# Altium PCB MC_PCB.PcbDoc
Units mm, origin at the board's own origin, x right, y up, seen from the top; angles counter-clockwise.
Board outline 75 x 70 mm, 2 copper layers (Top Layer, Bottom Layer); 48 components, 32 nets, 133 pads, 82 vias.
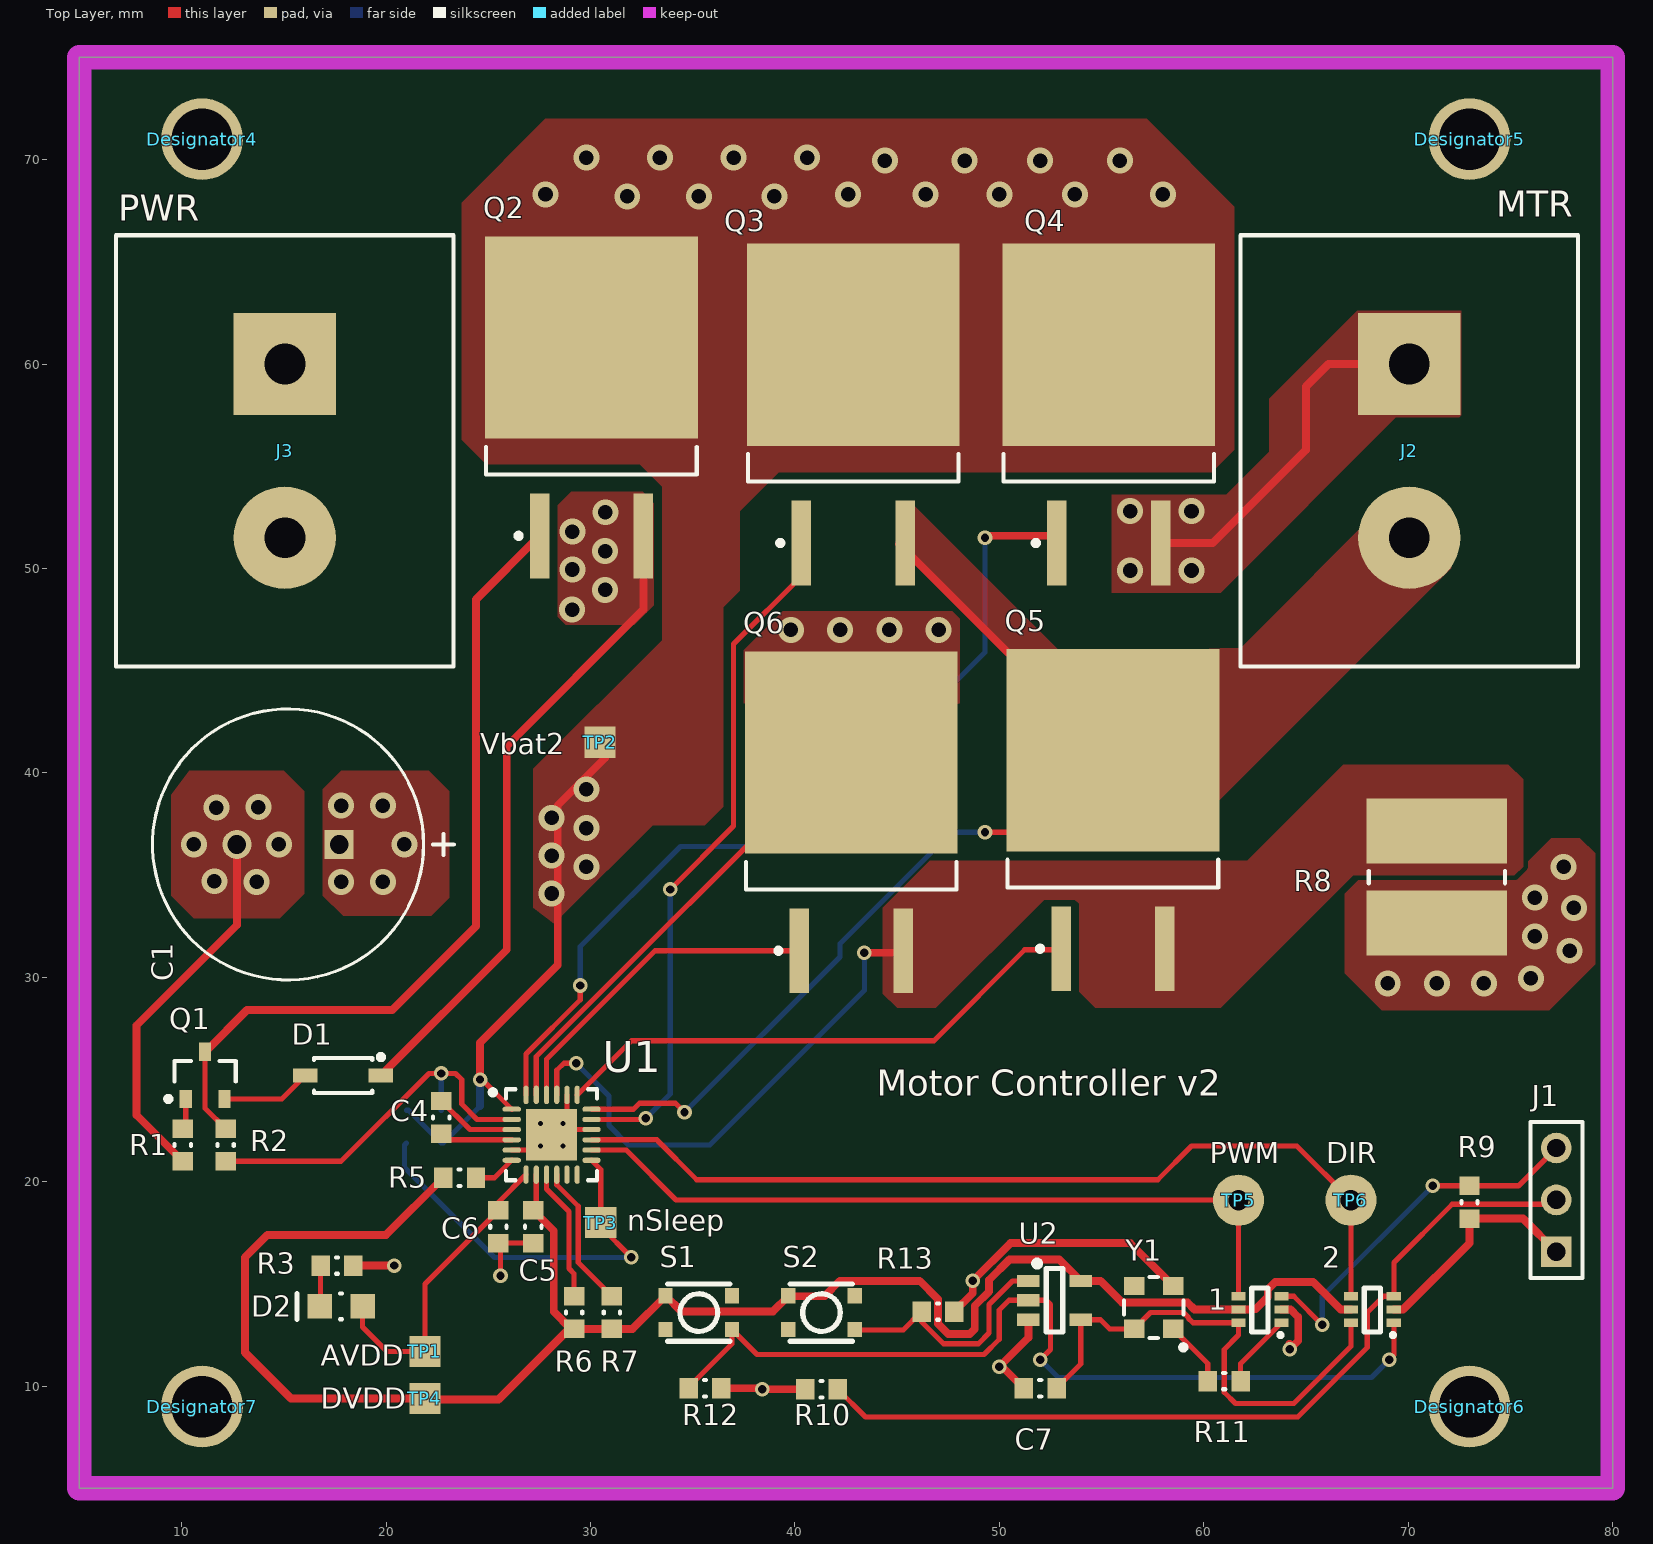
[diagram p0: Top Layer view]
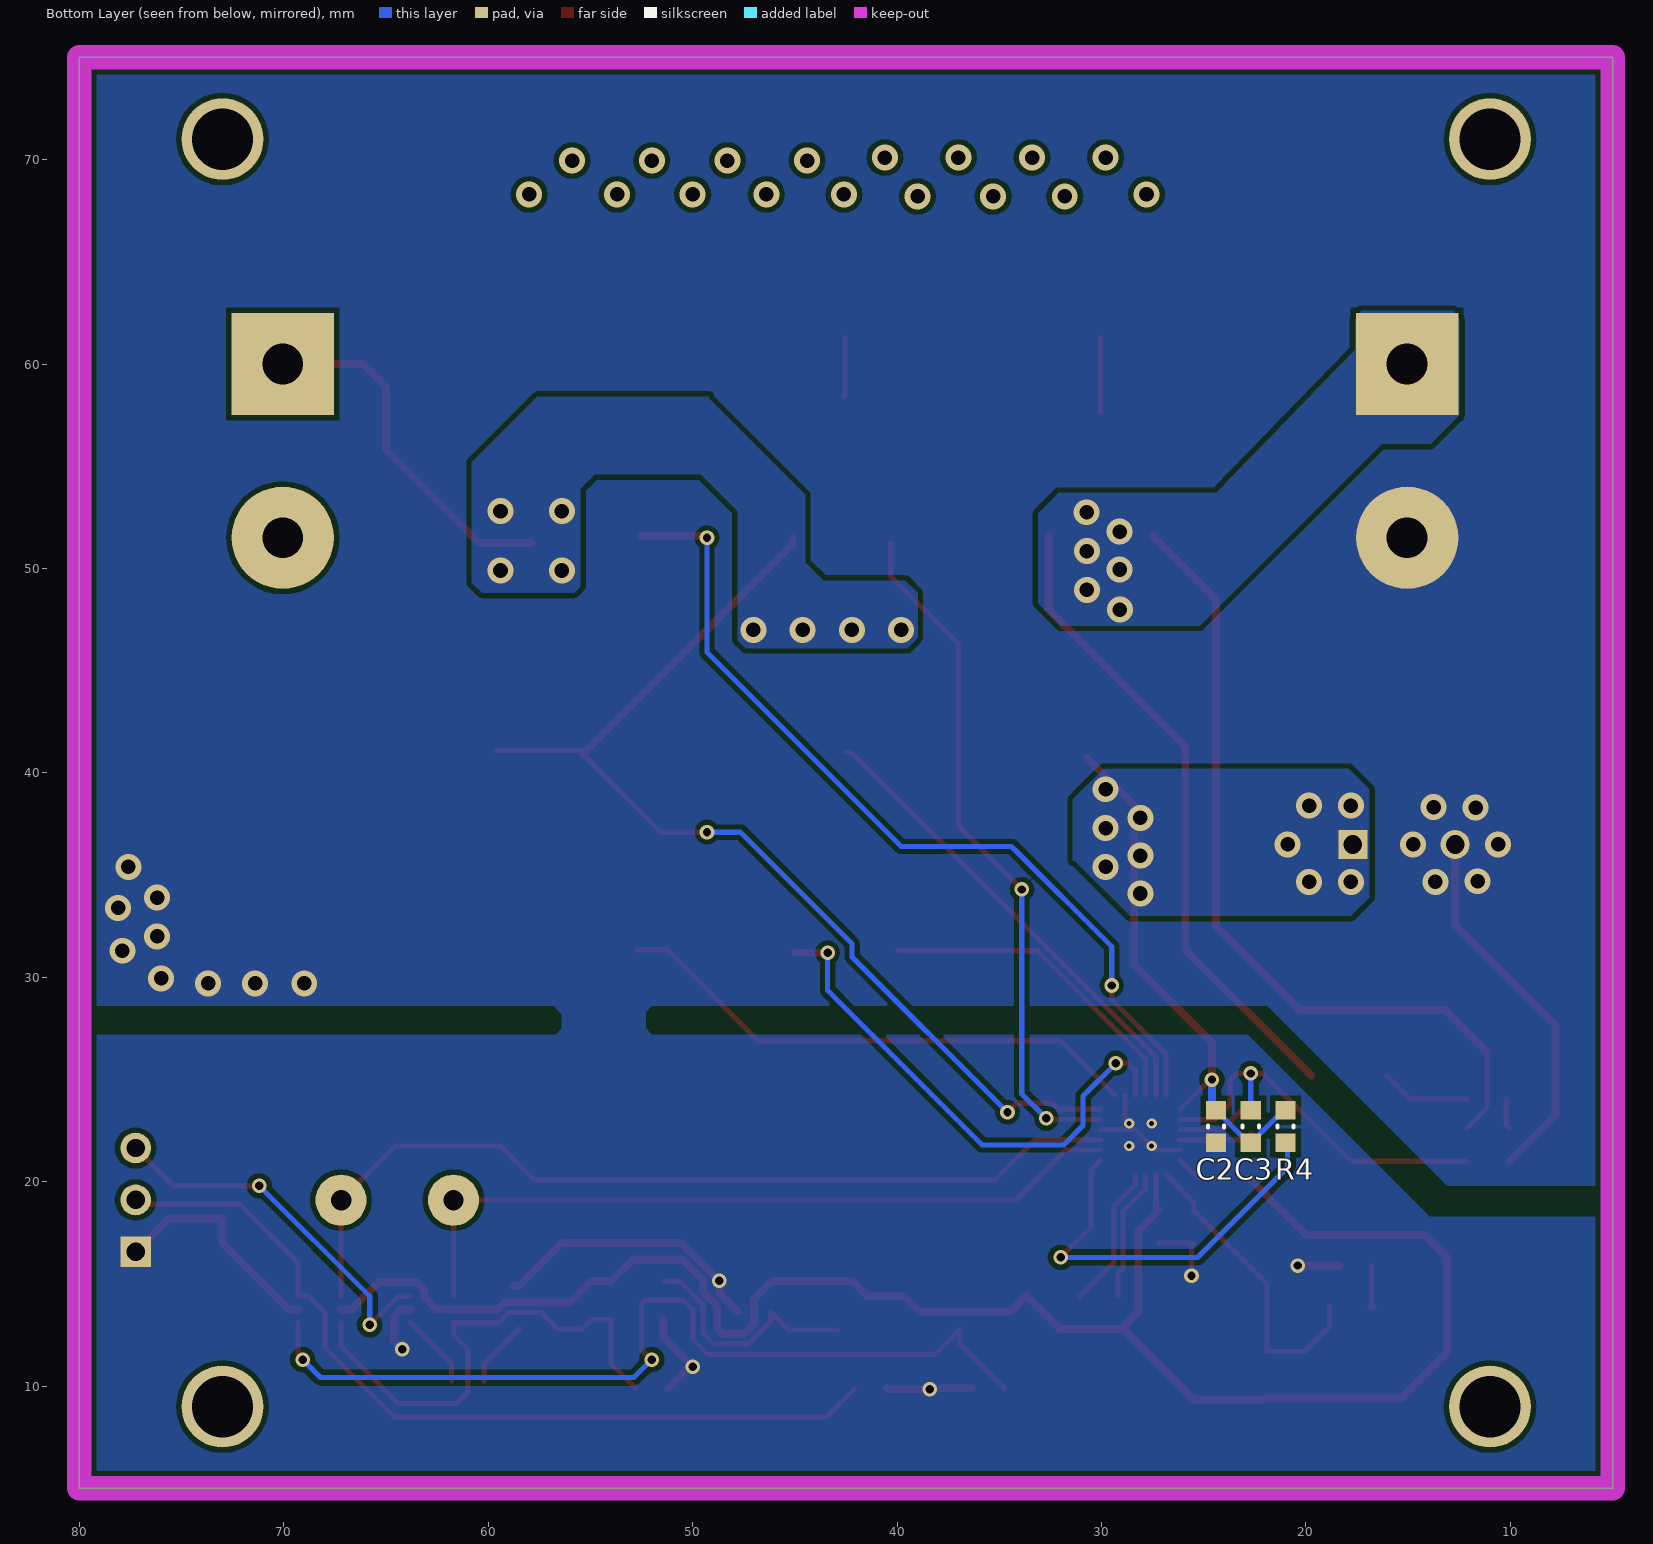
[diagram p1: Bottom Layer view, seen from below]

## Layer stack, top to bottom
Top Solder: solder mask 0.0102, Solder Resist, Dk 3.5
Top Layer: signal copper 0.0356
Dielectric 1: dielectric 0.32, FR-4, Dk 4.8
Bottom Layer: signal copper 0.0356
Bottom Solder: solder mask 0.0102, Solder Resist, Dk 3.5

## Board outline
5,5 5,75 80,75 80,5
cut-out: 12.167,88.254

## Design rules (kind name [scope] priority, off if disabled: settings)
Clearance [All] p1: gap=0.254 ignorepadtopadclearanceinfootprint=FALSE except(0: Arc-Hole Track-Hole SMDPad-Hole THPad-Hole Via-Hole Fill-Hole Poly-Hole Region-Hole Text-Hole; 0.1: SMDPad-SMDPad; 0.127: Arc-Arc Arc-Track Arc-SMDPad Track-Track Track-SMDPad)
HoleSize [All] p1: absolutevalues=TRUE maxlimit=2.54 minlimit=0.254 maxpercent=80.000 minpercent=20.000
PolygonConnect [All] p1: connectstyle=Direct reliefconductorwidth=0.254 reliefentries=4 polygonreliefangle="90 Angle" airgapwidth=0.254
RoutingVias [All] p1: holewidth=0.711 width=1.27 viastyle="Through Hole" minholewidth=0.711 minwidth=1.27 maxholewidth=0.711 maxwidth=1.27
SolderMaskExpansion [All] p1: expansion=0.102
Width [All] p1: maxlimit=0.508 minlimit=0.254 preferedwidth=0.254 minimp=50.000000 maximp=50.000000 favimp=50.000000
29 further rules are at their usual default settings.

## Classes and differential pairs
component class MCMainSch: C1 C2 C3 C4 C5 C6 D1 D2 Q1 Q2 Q3 Q4 Q5 Q6 R1 R2 R3 R4 R5 R6 R7 R8 TP1 TP2 TP3 TP4 U1
component class MC_Sch2: 1 2 C7 J1 J2 J3 R9 R10 R11 R12 R13 S1 S2 TP5 TP6 U2 Y1

## Components (designator, comment, footprint, x,y, rotation, side; value= is the part's Value field where it differs from the comment)
1 "74LVC1G3157GW,125" "IC MUX/DEMUX" 62.75,13.75 r180 top
2 "74LVC1G3157GW,125" "IC MUX/DEMUX" 68.25,13.75 r180 top
C1 "CAP_22uF_POL" CAPR-2/4h6.8 15.206,36.5 r180 top value=1000uF
C2 "CAP_0.1uF_16V_0603" CAPC0603(1608)55_N 24.4,22.7 r90 bottom value=0.1uF
C3 "CAP_0.1uF_16V_0603" CAPC0603(1608)55_N 22.698,22.7 r270 bottom value=0.1uF
C4 "CAP_0.1uF_16V_0603" CAPC0603(1608)55_N 22.7,23.15 r90 top value=0.1uF
C5 "CAP_1uF_16V_0603" CAPC0603(1608)55_N 27.2,17.8 r90 top value=1uF
C6 "CAP_1uF_16V_0603" CAPC0603(1608)55_N 25.5,17.8 r90 top value=1uF
C7 "CAP_10nF_0603" CAPC0603(1608)55_N 52,9.9 r180 top value=100nF
D1 "0" DIODSOD-123 17.9,25.2 r0 top
D2 "DIO_LED_G" LED_0805_LINE 17.8,13.9 r180 top
Designator4 "Comment" MOUNTING_HOLE#1 9.7,70.8 r0 top
Designator5 "Comment" MOUNTING_HOLE#2 74.5,70.8 r0 top
Designator6 "Comment" MOUNTING_HOLE#3 74.5,8.6 r0 top
Designator7 "Comment" MOUNTING_HOLE#4 9.7,10 r0 top
J1 "M" HDR1X3 77.25,16.57 r90 top
J2 "MTR" OSTYK51102030 70.05,55.75 r270 top
J3 "PWR" OSTYK51102030 15.05,55.75 r270 top
Q1 "NPN_40V_100mA" SOT23-3 11.15,25.2 r90 top
Q2 "NMOS_40V_75A" SOT404 30.05,59.75 r90 top
Q3 "NMOS_40V_75A" SOT404 42.85,59.4 r90 top
Q4 "NMOS_40V_75A" SOT404 55.35,59.4 r90 top
Q5 "NMOS_40V_75A" SOT404 55.56,39.555 r90 top
Q6 "NMOS_40V_75A" SOT404 42.76,39.455 r90 top
R1 "RES_43K_0603" RESC0603(1608)_N 10.05,21.8 r90 top value=43K
R2 "RES_10K_0603" RESC0603(1608)_N 12.15,21.8 r90 top value=10K
R3 "RES_0R_0603" RESC0603(1608)_N 17.6,15.9 r180 top value=100R
R4 "RES_698K_0603" RESC0603(1608)_N 21,22.7 r90 bottom value=698K
R5 "RES_10K_0603" RESC0603(1608)_N 23.6,20.2 r0 top value=10K
R6 "RES_10K_0603" RESC0603(1608)_N 29.2,13.6 r90 top value=10K
R7 "RES_10K_0603" RESC0603(1608)_N 31.05,13.6 r90 top value=10K
R8 "RES_10m_2728" STAC-CSS2725-099H_V 71.4,34.9 r90 top value=10m
R9 "RES_10K_0603" RESC0603(1608)_N 73,19 r90 top value=10K
R10 "RES_10K_0603" RESC0603(1608)_N 41.3,9.85 r0 top value=10K
R11 "RES_0R_0603" RESC0603(1608)_N 61,10.25 r0 top value=0R
R12 "RES_10K_0603" RESC0603(1608)_N 35.6,9.9 r180 top value=10K
R13 "RES_10K_0603" RESC0603(1608)_N 47,13.65 r180 top value=10K
S1 "SW_PWR" PTS830GM140 35.3,13.6 r180 top
S2 "SW_PWR" PTS830GM140 41.3,13.6 r180 top
TP1 "AVDD" TESTPOINT 21.9,11.7 r270 top
TP2 "Vbat2" TESTPOINT 30.468,41.5 r90 top
TP3 "nSleep" TESTPOINT 30.5,18 r90 top
TP4 "DVDD" TESTPOINT 21.9,9.4 r90 top
TP5 "PWM" TESTPOINT_LOOP 61.7,19.1 r0 top
TP6 "DIR" TESTPOINT_LOOP 67.2,19.1 r0 top
U1 "DRV8701ERGET" VFQFPN-24_N 28.1,22.3 r0 top
U2 "SN74AHC1G02DBVT" SOT23-5 52.7,14.2 r0 top
Y1 "2kHz" CDFN-4 58.5,12.8 r180 top

## Footprints (in the part's own frame and the unit in brackets; to place one, negate y for a bottom-side part, rotate by r counter-clockwise, add the part's x,y. Pads: shape width x height; smd on the part's side, far side on the other; paste and mask are expansions set on the pad)
CAPC0603(1608)55_N [mm] "Chip Capacitor, Body 1.6x0.8mm, Height 0.55mm, IPC Medium Density"
  rect 0.9x1 smd: 1(-0.8,0) 2(0.8,0)
  silkscreen extent -0.05,-0.4 0.05,0.4, body extent -0.87,-0.48 0.88,0.47, height 0.55
CAPR-2/4h6.8 [mil]
  rect 56x56 hole 36: 1(-98.5,0)
  round 56 hole 36: 2(98.5,0)
  silkscreen extent -319,-261 261,261
CDFN-4 [mm]
  rect 1x0.9 smd: 1(0,0) 2(0,-2.1) 3(1.9,-2.1) 4(1.9,0)
  silkscreen extent -0.63,-2.55 2.4,1.02
DIODSOD-123 [mm] "SOD-123, 2-Leads, Body 2.85x1.7mm (max), Pitch 3.7mm"
  rect 1.2x0.7 smd: 1(-1.85,0) 2(1.85,0)
  silkscreen extent -1.43,-0.85 1.97,1.02, body extent -1.42,-0.85 1.43,0.85, height 1.45
HDR1X3 [mm] "Connector; Header; 3 Position"
  rect 1.5x1.5 hole 0.9: 1(0,0)
  round 1.5 hole 0.9: 2(2.54,0) 3(5.08,0)
  silkscreen extent -1.27,-1.27 6.35,1.27
"IC MUX/DEMUX" [mm]
  rect 0.7x0.4 smd: 1(-1.05,0.65) 2(-1.05,0) 3(-1.05,-0.65) 4(1.05,-0.65) 5(1.05,0) 6(1.05,0.65)
  silkscreen extent -1.07,-1.05 0.4,1.32, body extent -1.05,-1 1.05,1, height 1.11
LED_0805_LINE [mm] "SMD, 2-Leads, Body 2x1.25mm"
  rect 1.2x1.2 smd: 1(-1.05,0) 2(1.05,0)
  silkscreen extent -0.05,-0.63 2.16,0.64, body extent -1,-0.63 1,0.63, height 0.8
MOUNTING_HOLE#1 [mm]
  round 4 hole 3 unplated: 0(1.3,0.2)
MOUNTING_HOLE#2 [mm]
  round 4 hole 3 unplated: 0(-1.5,0.2)
MOUNTING_HOLE#3 [mm]
  round 4 hole 3 unplated: 0(-1.5,0.4)
MOUNTING_HOLE#4 [mm]
  round 4 hole 3 unplated: 0(1.3,-1)
OSTYK51102030 [mm] "Connector; Header; 2 Position"
  rect 5x5 hole 2: 1(-4.25,0)
  round 5 hole 2: 2(4.25,0)
  silkscreen extent -10.55,-8.25 10.55,8.25
PTS830GM140 [mm] "PWR TACTILE SWITCH (RED)"
  rect 0.7x0.75 smd: 1(-1.625,0.825) 2(1.625,0.825) 3(-1.625,-0.825) 4(1.625,-0.825)
  silkscreen extent -1.53,-1.4 1.53,1.4
RESC0603(1608)_N [mm] "Chip Resistor, Body 1.6x0.8mm, IPC Medium Density"
  rect 0.9x1 smd: 1(-0.8,0) 2(0.8,0)
  silkscreen extent -0.05,-0.4 0.05,0.4, body extent -0.85,-0.47 0.85,0.47, height 0.6
SOT23-3 [mm] "SOT23, 3-Leads, Body 2.90x2.30mm, Pitch 0.95mm, IPC Medium Density"
  rect 0.9x0.6 smd: 1(-1.15,0.95) 2(-1.15,-0.95) 3(1.15,0)
  silkscreen extent -1.27,-1.5 0.7,1.92, body extent -1.3,-1.5 1.3,1.5, height 1.1
SOT23-5 [mm]
  rect 1.1x0.6 smd: 1(-1.279,0.95) 2(-1.279,0) 3(-1.279,-0.95) 4(1.279,-0.95) 5(1.279,0.95)
  silkscreen extent -0.99,-1.55 0.4,1.94, body extent -1.4,-1.45 1.4,1.45, height 1.2
SOT404 [mm]
  rect 4.15x0.95 smd: 1(-8.155,2.54) 3(-8.155,-2.54)
  rect 9.9x10.4 smd: 4(1.545,0)
  silkscreen extent -8.28,-5.15 -3.8,5.15, body extent -5.16,-5.15 4.64,5.15, height 4.5
STAC-CSS2725-099H_V [mm] "Chip Resistor, 2-Leads, Body 7.06x6.7mm"
  rect 3.18x6.86 smd: 1(-2.25,0) 2(2.25,0)
  silkscreen extent -0.3,-3.33 0.3,3.33, body extent -3.53,-3.35 3.53,3.35, height 1.24
TESTPOINT [mil]
  rect 60x60 smd: 1(0,0)
TESTPOINT_LOOP [mm]
  round 2.5 hole 1: 1(0,0)
VFQFPN-24_N [mm] "QFN, 24-Leads, Body 4x4mm, Pitch 0.5mm, Thermal Pad 2.5x2.5mm, IPC Medium Density"
  oval 0.9x0.25 smd: 1(-1.95,1.25) 2(-1.95,0.75) 3(-1.95,0.25) 4(-1.95,-0.25) 5(-1.95,-0.75) 6(-1.95,-1.25) 13(1.95,-1.25) 14(1.95,-0.75) 15(1.95,-0.25) 16(1.95,0.25) 17(1.95,0.75) 18(1.95,1.25)
  oval 0.25x0.9 smd: 7(-1.25,-1.95) 8(-0.75,-1.95) 9(-0.25,-1.95) 10(0.25,-1.95) 11(0.75,-1.95) 12(1.25,-1.95) 19(1.25,1.95) 20(0.75,1.95) 21(0.25,1.95) 22(-0.25,1.95) 23(-0.75,1.95) 24(-1.25,1.95)
  rect 2.5x2.5 smd: 25(0,0)
  silkscreen extent -3,-2.22 2.23,2.23, body extent -2.07,-2.07 2.08,2.08, height 1

## Part data
1 2: library part "IC MUX/DEMUX 2x1", Case/Package=TSSOP, Manufacturer="NXP Semiconductors", Max Operating Temperature=125°C, Max Power Dissipation=250mW, Max Supply Voltage=5.5V, Min Operating Temperature=-40°C, Min Supply Voltage=1.65V, On-State Resistance=15R, Operating Supply Current=40uA, Package Quantity=3000, Supplier Part Number 1=1727-6073-6-ND, Bandwidth=300MHz, ComponentLink1Description=http://www.nxp.com/documents/data_sheet/74LVC1G3157.pdf?src-supplier=Avnet, ComponentLink1URL=http://www.nxp.com/documents/data_sheet/74LVC1G3157.pdf?src-supplier=Avnet, ComponentLink2Description=https://www.verical.com/server-webapp/html/getDatasheet?partID=347929&src-supplier=Verical, ComponentLink2URL=https://www.verical.com/server-webapp/html/getDatasheet?partID=347929&src-supplier=Verical, ComponentLink3Description=http://www.nxp.com/documents/data_sheet/74LVC1G3157.pdf?src-supplier=Avnet+Asia, ComponentLink3URL=http://www.nxp.com/documents/data_sheet/74LVC1G3157.pdf?src-supplier=Avnet+Asia, ComponentLink4Description=http://www.nxp.com/documents/data_sheet/74LVC1G3157.pdf?src-supplier=Digi-Key, ComponentLink4URL=http://www.nxp.com/documents/data_sheet/74LVC1G3157.pdf?src-supplier=Digi-Key, ComponentLink5Description=http://www.nxp.com/documents/data_sheet/74LVC1G3157.pdf?src-supplier=Avnet+Europe, ComponentLink5URL=http://www.nxp.com/documents/data_sheet/74LVC1G3157.pdf?src-supplier=Avnet+Europe, Lead Free="Lead Free", Logic Function=Demultiplexer,Demux,Multiplexer,Mux, Manufacturer Part Number=74LVC1G3157GW,125, Mount="Surface Mount", Number of Channels=1, Number of Circuits=1, Number of Inputs=2, Number of Outputs=1, Number of Pins=6, Packaging="Tape and Reel", Power Dissipation=250mW, Pricing 1="1=0.37, 10=0.276, 100=0.156, 500=0.10332, 1000=0.07921 (USD)", Propagation Delay=1ns, Radiation Hardening=No, REACH SVHC="No SVHC", Stock 1=109219, Supplier 1=Digi-Key, Supply Type=Single, Turn-Off Delay Time=6ns, Turn-On Delay Time=8.7ns
C1: "CAP ALUM 22UF 20% 50V RADIAL", Digikey Part Number=732-8857-1-ND, Manufacturer="Wurth Electronics Inc.", MPN=860020672011, Tolerance=20%, Voltage Rating=50V
C2 C3 C4: "CAP CER 0.1UF 16V X7R 0603", Digikey Part Number=311-1088-1-ND, Manufacturer=Yageo, MPN=CC0603KRX7R7BB104, Package="0603 (1608 Metric)", Temperature Coefficient=X7R, Voltage Rating=16V, Dimensions="0.063\" L x 0.031\" W (1.60mm x 0.80mm)"
C5 C6: "CAP CER 1UF 16V Y5V 0603", Digikey Part Number=311-1372-1-ND, Manufacturer=Yageo, MPN=CC0603ZRY5V7BB105, Package="0603 (1608 Metric)", Temperature Coefficient=Y5V, Voltage Rating=16V, Dimensions="0.063\" L x 0.031\" W (1.60mm x 0.80mm)"
C7: "CAP CER 10000PF 16V X7R 0603", Digikey Part Number=311-3369-1-ND, Manufacturer=Yageo, MPN=CC0603KRX7R7BB103, Package="0603 (1608 Metric)", Temperature Coefficient=X7R, Voltage Rating=16V, Dimensions="0.063\" L x 0.031\" W (1.60mm x 0.80mm)"
D1: library part DIO_BAS16GW, "ESD PROTECTION DIODE", Digikey Part Number=1727-7320-1-ND, Manufacturer=Nexperia, MPN=BAS16GW, Package=SOD-123, ComponentLink1Description=Datasheet, ComponentLink1URL=https://assets.nexperia.com/documents/data-sheet/BAS16GW.pdf, Supplier 1=Digi-Key, Supplier Part Number 1=1727-7320-1-ND
D2: "LED GREEN DIFFUSED 0805 SMD", Digikey Part Number=475-1410-1-ND, Forward Voltage Drop=2.2V, Manufacturer=OSRAM, MPN="LG R971-KN-1", Package="0805 (2012 Metric)"
J1: library part "Header 3", "Header, 3-Pin", LatestRevisionDate=17-Jul-2002, LatestRevisionNote="Re-released for DXP Platform.", Publisher="Altium Limited"
J2 J3: library part TERMINAL_2, "Header, 2-Pin", LatestRevisionDate=17-Jul-2002, LatestRevisionNote="Re-released for DXP Platform.", Publisher="Altium Limited"
Q1: "TRANS NPN 40V 0.2A SOT23", Digikey Part Number=MMBT3904TPMSCT-ND, Manufacturer="Micro Commercial Co", MPN=MMBT3904-TP, Package="TO-236-3, SC-59, SOT-23-3", ComponentLink1Description=Datasheet, ComponentLink1URL=http://www.mccsemi.com/up_pdf/MMBT3904(SOT-23).pdf
Q2 Q3 Q4 Q5 Q6: "MOSFET N-CH 40V 75A D2PAK", Digikey Part Number=1727-7257-1-ND, Manufacturer="Nexperia USA Inc.", MPN=BUK768R1-40E,118, Package="TO-263-3, D²Pak (2 Leads + Tab), TO-263AB", Supplier Part Number 1=1727-7255-1-ND, ComponentLink1Description=Datasheet, ComponentLink1URL=http://aosmd.com/res/data_sheets/AO3420.pdf, Supplier 1=Digi-Key
R1: "RES SMD 43K OHM 5% 1/10W 0603", Digikey Part Number=311-43KGRCT-ND, Manufacturer=Yageo, MPN=RC0603JR-0743KL, Package="0603 (1608 Metric)", Tolerance=5%, Dimensions="0.063\" L x 0.031\" W (1.60mm x 0.80mm)"
R2 R5 R6 R7 R9 R10 R12 R13: "RES SMD 10K OHM 5% 1/10W 0603", Digikey Part Number=311-10KGRCT-ND, Manufacturer=Yageo, MPN=RC0603JR-0710KL, Package="0603 (1608 Metric)", Tolerance=5%, Dimensions="0.063\" L x 0.031\" W (1.60mm x 0.80mm)"
R3 R11: "RES SMD 0 OHM JUMPER 1/10W 0603", Digikey Part Number=311-0.0GRCT-ND, Manufacturer=Yageo, MPN=RC0603JR-070RL, Package="0603 (1608 Metric)", Dimensions="0.063\" L x 0.031\" W (1.60mm x 0.80mm)"
R4: "RES SMD 698K OHM 1% 1/10W 0603", Digikey Part Number=311-698KHRCT-ND, Manufacturer=Yageo, MPN=RC0603FR-07698KL, Package="0603 (1608 Metric)", Tolerance=1%, Dimensions="0.063\" L x 0.031\" W (1.60mm x 0.80mm)"
R8: "RES SMD 10mOHM 1% 4W 2728", Digikey Part Number=CSSH2728FT10L0DKR-ND, Manufacturer=Yageo, MPN=RC0603FR-07698KL, Package="0603 (1608 Metric)", Tolerance=1%, Dimensions="0.063\" L x 0.031\" W (1.60mm x 0.80mm)", Supplier 1=Digi-Key
S1 S2: "Power Switch (Red)", Digikey Part Number=CKN10587CT-ND, Manufacturer=C&K, MPN="PTS830GM140 SMTR LFS", ComponentLink1Description=Datasheet, ComponentLink1URL=https://www.ckswitches.com/media/1478/pts830.pdf
TP1 TP2 TP3 TP4 TP5 TP6: library part *, "TESTPOINT_SMD"
U1: library part "IC Motor Driver", Case/Package=VQFN, Manufacturer="Texas Instruments", Max Operating Temperature=125°C, Min Operating Temperature=-40°C, Supplier Part Number 1=296-42155-1-ND, Interface=Parallel, Lead Free="Lead Free", Manufacturer Part Number=DRV8701ERGET, Mount="Surface Mount", Packaging="Tape and Reel", Pricing 1="1=2.83, 10=2.541, 100=2.0425 (USD)", Stock 1=17098, Supplier 1=Digi-Key
U2: library part "IC GATE XOR", Case/Package=SOT-23, High Level Output Current=-8mA, Low Level Output Current=8mA, Manufacturer="Texas Instruments", Max Operating Temperature=125°C, Max Supply Voltage=5.5V, Min Operating Temperature=-40°C, Min Supply Voltage=2V, Package Quantity=250, Quiescent Current=1uA, Supplier Part Number 1=296-1094-1-ND, ComponentLink1Description=http://www.ti.com/lit/ds/symlink/sn74ahc1g02.pdf?src-supplier=Digi-Key, ComponentLink1URL=http://www.ti.com/lit/ds/symlink/sn74ahc1g02.pdf?src-supplier=Digi-Key, ComponentLink2Description=http://focus.ti.com/lit/ds/symlink/sn74ahc1g02.pdf?src-supplier=Avnet+Europe, ComponentLink2URL=http://focus.ti.com/lit/ds/symlink/sn74ahc1g02.pdf?src-supplier=Avnet+Europe, ComponentLink3Description=http://www.farnell.com/datasheets/1786933.pdf?src-supplier=Element14, ComponentLink3URL=http://www.farnell.com/datasheets/1786933.pdf?src-supplier=Element14, Lead Free="Lead Free", Logic Function=NOR, Manufacturer Part Number=SN74AHC1G02DBVT, Max Output Current=8mA, Mount="Surface Mount", Number of Bits=1, Number of Circuits=1, Number of Elements=1, Number of Gates=1, Number of Input Lines=2, Number of Inputs=2, Number of Output Lines=1, Number of Outputs=1, Number of Pins=5, Output Current=8mA, Packaging="Tape and Reel", Propagation Delay=7.5ns, Radiation Hardening=No, REACH SVHC="No SVHC", Supplier 1=Digi-Key, Termination=SMD/SMT, Turn-On Delay Time=8.5ns, Weight=0.000557oz
Y1: library part OSC_2kHz, "OSCILLATOR_2kHz", Supplier Part Number 1=DSC6083CI2A-002K000-ND, Supplier 1=Digi-Key

## Via types
v1: diameter 1.27, hole 0.711, Top Layer to Bottom Layer, 57 vias
v2: diameter 0.711, hole 0.406, Top Layer to Bottom Layer, 21 vias
v3: diameter 0.508, hole 0.254, Top Layer to Bottom Layer, 4 vias

## Nets (pads, with @x,y where several pads share a name; then routed paths per layer and width w, separated by ;. In a path a pad name is that pad's centre, name@x,y a point inside that pad or via, vN(x,y) a via of type N, cw(c..) or ccw(c..) an arc to the next point about the centre after c; other vN are vias at no path point)
AVDD: C6.2 D2.1 TP1.1 U1.7 | length 15.2
  Top Layer w0.254: D2.1 18.85,12.9 20.05,11.7 TP1.1 21.9,15 C6.2 25.5,19 U1.7
DVDD: 1.5 2.5 C5.2 R5.1 R6.1 R7.1 S1.4 S2.4 TP4.1 U1.8 U2.5 | length 89.1
  Top Layer w0.254: C5.2 27.35,18.75 U1.8
  Top Layer w0.381: R5.1 20,17.4 14.2,17.4 13.1,16.3 13.1,11.65 15.35,9.4 TP4.1 21.95,9.35 25.5,9.35 28.95,12.8 R6.1@29.05,12.8 ; C5.2 28.2,17.6 28.2,13.65 R6.1@29.05,12.8 ; 2.5 66.7,13.75 65.35,15.1 63.501,15.1 63.132,14.732 63.132,14.363 62.53,13.761 62.2,13.761 62.2,13.75 1.5 59.55,13.75 59.2,14.1 56,14.1 54.95,15.15 U2.5 52.929,16.2 50.5,16.2 49.5,15.2 49.5,14.632 48.8,13.932 48.8,12.8 48.55,12.55 47.5,12.55 47,13.05 47,14.25 46.1,15.15 42.2,15.15 41.45,14.4 39.675,14.4 38.925,13.65 34.45,13.65 S1.4 32.05,12.8 R7.1 R6.1 R6.1@29.05,12.8
GND: 1.2 2.2 C1.2 C2.1 C5.1 C6.1 C7.2 J1.1 J3.2 R1.1 R3.1 R8.1 R9.1 R10.1 R12.1 R13.1 U1.5 U1.16 U1.20 U1.25 U2.3 Y1.2 | length 65.5
  Top Layer w0.254: v2(25.6,15.4) 25.6,16.9 C6.1 C5.1 ; U1.5 U1.25@27.35,21.55 ; v3(27.55,21.75) U1.25 28.35,22.55 U1.16 ; U1.25@28.85,23.05 U1.20
  Top Layer w0.381: R1.1 7.8,23.25 7.8,27.65 12.704,32.554 C1.2 ; R3.1 v2(20.4,15.9) ; R12.1@36.35,9.9 38.35,9.9 v2(38.4,9.85) 40.45,9.85 R10.1@40.5,9.9 ; R13.1 48.7,14.55 v2(48.7,15.15) 50.55,17 56.4,17 Y1.2 Y1.2@58.8,14.9 ; v2(50,10.95) v2@50.15,10.95 ; C7.2 v2@50.15,10.95 ; U2.3 51.421,12.371 50.075,11.025 v2@50.15,10.95 ; 1.2 64.25,13.75 64.621,13.379 64.621,12.221 v2(64.2,11.8) v2@64.2,12.077 ; 2.2 69.75,13.75 73,17 R9.1 75.62,18.2 J1.1
  other v1: 69,29.7 71.4,29.7 73.7,29.7 76,29.952 77.9,31.3 76.2,32 78.1,33.4 76.2,33.9 13.674,34.673 11.6,34.7 77.6,35.4 10.6,36.5 14.756,36.5 11.7,38.3 13.756,38.327
  other v3: 28.65,21.75 27.55,22.85 28.65,22.85
Net1_1: 1.1 R11.2 | length 3.7
  Top Layer w0.254: R11.2 61.8,11.1 1.1
Net1_3: 1.3 J1.3 R9.2 | length 18.4
  Top Layer w0.254: 1.3 64.4,14.4 v2(65.8,13) ; v2(71.2,19.8) R9.2 75.4,19.8 J1.3
  Bottom Layer w0.254: v2(65.8,13) 65.8,14.4 v2(71.2,19.8)
Net1_4: 1.4 TP5.1 U1.14 | length 37.9
  Top Layer w0.254: U1.14 31.75,21.55 34.19,19.11 61.31,19.11 61.7,19.5 1.4
Net1_6: 1.6 2.6 C7.1 U2.4 Y1.4 | length 24.7
  Top Layer w0.254: C7.1 53.979,11.079 U2.4 54.95,13.25 55.4,12.8 Y1.4 57.4,13.6 59.009,13.6 59.254,13.355 59.254,13.317 59.471,13.1 1.6 61.7,12.5 61,11.8 61,9.7 61.546,9.154 64.403,9.154 67.2,11.95 2.6
Net2_1: 2.1 R12.2 S1.1 U2.2 | length 44.5
  Top Layer w0.254: R12.2@34.75,9.9 36.925,12.075 S1.1 38.15,11.55 49.25,11.55 50,12.3 50,13.725 50.475,14.2 U2.2 52.3,14.2 52.5,14 52.5,11.8 v2(52,11.3) ; v2(69.079,11.3) 69.3,11.521 2.1
  Bottom Layer w0.254: v2(52,11.3) 52.879,10.421 68.2,10.421 v2(69.079,11.3)
Net2_3: 2.3 J1.2 R10.2 | length 42.1
  Top Layer w0.254: R10.2 43.45,8.5 64.6,8.5 68,11.9 68,13.6 68.8,14.4 2.3 69.3,16.05 72.154,18.904 77.044,18.904 J1.2
Net2_4: 2.4 TP6.1 U1.15 | length 44.4
  Top Layer w0.254: U1.15 33.25,22.05 35.2,20.1 57.75,20.1 59.4,21.75 64.55,21.75 TP6.1 2.4
NetC1_1: C1.1 C2.2 C3.2 Q2.4 Q3.4 Q4.4 R4.2 TP2.1 U1.1 | length 33.6
  Top Layer w0.254: C1.1 C1.1@18.05,36.5 ; v2(24.6,25) 24.7,25 U1.1 ; Q2.4@30.05,57.65 Q2.4 ; 30.717,40.733 TP2.1@30.742,40.758 ; Q3.4@42.55,58.45 Q3.4@42.55,61.295
  Top Layer w0.381: v2(24.6,25) 24.6,26.8 28.4,30.6 28.4,38.416 30.717,40.733
  Bottom Layer w0.254: R4.2 21.098,23.5 C3.2 22.8,21.9 C2.2 C2.2@24.6,23.7
  Bottom Layer w0.381: C2.2@24.6,23.7 v2(24.6,25)
  other v1: 28.1,34.1 17.8,34.673 19.85,34.673 29.8,35.4 28.1,35.95 20.9,36.5 29.8,37.3 28.1,37.8 17.8,38.4 19.85,38.4 29.8,39.2 31.8,68.2 35.3,68.2 39,68.2 27.8,68.3 42.6,68.3 46.4,68.3 50,68.3 53.7,68.3 58,68.3 44.4,69.95 48.3,69.95 52,69.95 55.9,69.95 29.8,70.1 33.4,70.1 37,70.1 40.6,70.1
NetC3_1: C3.1 R2.1 U1.2 | length 19.2
  Top Layer w0.254: R2.1 17.8,21 22.1,25.3 v2(22.7,25.3) 23.4,25.3 23.7,25 23.7,23.8 24.45,23.05 U1.2
  Bottom Layer w0.254: C3.1 22.698,25.298 v2(22.7,25.3)
NetC4_1: C4.1 U1.4 | length 3.6
  Top Layer w0.254: C4.1 23,22.05 U1.4
NetC4_2: C4.2 U1.3 | length 4
  Top Layer w0.254: C4.2 24.1,22.55 U1.3
NetD1_1: D1.1 Q1.2 | length 4.4
  Top Layer w0.254: Q1.2 14.9,24.05 D1.1
NetD1_2: D1.2 J3.1 Q2.3 | length 31.7
  Top Layer w0.381: D1.2 25.9,31.35 25.9,41.3 32.59,47.99 Q2.3
  other v1: 29.1,47.99 30.717,48.95 29.117,49.95 30.717,50.85 29.117,51.8 30.734,52.75
NetD2_2: D2.2 R3.2 | length 2
  Top Layer w0.254: D2.2@16.8,13.95 R3.2
  Top Layer w0.381: D2.2 D2.2@16.8,13.95
NetJ2_1: J2.1 Q4.3 Q6.4 U1.23 | length 40.8
  Top Layer w0.254: U1.23 27.35,26.12 42.23,41 Q6.4@42.5,41
  Top Layer w0.381: Q4.3 60.445,51.245 65,55.8 65,58.9 66.1,60 J2.1
  other v1: 39.8,47 42.211,47 44.623,47 47.034,47 56.4,49.9 59.4,49.9 56.4,52.8 59.4,52.8
NetJ2_2: J2.2 Q3.3 Q5.4 U1.18 | length 52.6
  Top Layer w0.254: U1.18 32.108,23.55 32.395,23.837 34.163,23.837 v2(34.6,23.4) v2@34.4,23.4 ; Q3.3@45.09,51.205 Q3.3@45.09,51.595 ; v2(49.3,37.1) 51.56,37.1 Q5.4 Q5.4@59.65,41.1
  Top Layer w0.381: Q3.3@45.09,51.205 Q5.4@55.25,41.045
  Bottom Layer w0.254: v2(34.6,23.4) 42.2,31 42.2,31.647 47.653,37.1 v2(49.3,37.1)
NetQ1_1: Q1.1 R1.2 | length 1.5
  Top Layer w0.254: R1.2 10.2,22.75 Q1.1
NetQ1_3: Q1.3 Q2.1 R2.2 | length 40.3
  Top Layer w0.254: Q1.3 11.15,23.6 R2.2
  Top Layer w0.381: Q1.3 13.2,28.4 20.3,28.4 24.4,32.5 24.4,48.485 Q2.1
NetQ3_1: Q3.1 U1.17 | length 34
  Top Layer w0.254: U1.17 32.65,23.05 v2(32.7,23.1) ; v2(33.9,34.3) 37,37.4 37,46.3 40.31,49.61 Q3.1
  Bottom Layer w0.254: v2(32.7,23.1) 33.9,24.3 v2(33.9,34.3)
NetQ4_1: Q4.1 U1.24 | length 43
  Top Layer w0.254: U1.24 26.85,26.249 29.5,28.899 v2(29.5,29.6) ; v2(49.3,51.5) v2@49.395,51.595
  Top Layer w0.381: v2@49.395,51.595 Q4.1@52.51,51.595
  Bottom Layer w0.254: v2(29.5,29.6) 29.5,31.5 34.4,36.4 39.8,36.4 49.3,45.9 v2(49.3,51.5)
NetQ5_1: Q5.1 U1.19 | length 26.3
  Top Layer w0.254: U1.19 32,26.9 46.8,26.9 51.245,31.345 Q5.1@52.71,31.345
NetQ5_3: Q5.3 Q6.3 R8.2 U1.21 | length 25.6
  Top Layer w0.254: U1.21 28.35,25.45 28.7,25.8 v2(29.3,25.8) ; Q6.3@44.94,31.2 Q6.3@45.04,31.3
  Top Layer w0.381: v2(43.4,31.2) Q6.3@44.94,31.2
  Bottom Layer w0.254: v2(29.3,25.8) 30.9,24.2 30.9,22.75 31.85,21.8 35.834,21.8 43.4,29.366 v2(43.4,31.2)
NetQ6_1: Q6.1 U1.22 | length 16.1
  Top Layer w0.254: U1.22 27.85,25.992 33.158,31.3 Q6.1@39.96,31.3
NetR4_1: R4.1 TP3.1 U1.13 | length 19.7
  Top Layer w0.254: U1.13 30.5,20.6 TP3.1 30.5,17.8 v2(32,16.3)
  Bottom Layer w0.254: R4.1 20.9,21.8 20.9,20.7 25.3,16.3 v2(32,16.3)
NetR5_2: R5.2 U1.6 | length 2.1
  Top Layer w0.254: R5.2 25.3,20.2 U1.6
NetR6_2: R6.2 U1.9 | length 6.5
  Top Layer w0.254: U1.9 27.85,19.65 28.95,18.55 28.95,15.75 29.2,15.5 R6.2
NetR7_2: R7.2 U1.10 | length 7.1
  Top Layer w0.254: U1.10 28.35,19.85 29.4,18.8 29.4,16.05 R7.2
NetR11_1: R11.1 Y1.1 | length 3.3
  Top Layer w0.254: Y1.1 60.2,11.1 R11.1
NetR13_2: R13.2 S2.1 U2.1 | length 11.9
  Top Layer w0.254: S2.1@42.925,12.75 45.3,12.75 R13.2 46.2,13.15 47.275,12.075 48.975,12.075 49.5,12.6 49.5,14 50.65,15.15 U2.1
pads on no net: Designator4.0 Designator5.0 Designator6.0 Designator7.0 S1.2 S1.3 S2.2 S2.3 U1.11 U1.12 Y1.3

## Polygon pours and split planes (outlines as drawn)
GND on Bottom Layer "Bottom Layer-GND" (solid, pour order 76): 5.861,47 5.861,19.8 13.1,19.8 21.9,28.6 41.6,28.6 52,28.6 52.3,28.3 52.3,27.5 52,27.2 22.84,27.2 13.94,18.3 5.861,18.3 5.861,5.861 79.139,5.861 79.139,27.2 56.7,27.2 56.4,27.5 56.4,28.2 56.8,28.6 79.139,28.6 79.139,74.139 5.861,74.139
no net on Bottom Layer "Bottom Layer-No Net 6" (solid, pour order 74): 5.861,74.139
no net on Bottom Layer "Bottom Layer-No Net 7" (solid, pour order 70): 5,74.7
no net on Bottom Layer "Bottom Layer-No Net 4" (solid, pour order 62): 14.3,38.3
no net on Bottom Layer "Bottom Layer-No Net 5" (solid, pour order 60): 14,34.7
NetC1_1 on Bottom Layer "Bottom Layer-NetC1_1" (solid, pour order 48): 17.9,40.2 29.9,40.2 31.4,38.7 31.4,35.7 31.3,35.7 28.6,33 17.8,33 16.9,33.9 16.9,39.2
NetD1_2 on Bottom Layer "Bottom Layer-NetD1_2" (solid, pour order 40): 33.1,50.5 33.1,48.3 32,47.2 25.2,47.2 16.3,56.1 13.9,56.1 12.5,57.5 12.5,62.2 12.8,62.6 17.3,62.6 17.6,62.2 17.6,60.7 24.4,53.7 32.1,53.7 33.1,52.7
no net on Bottom Layer "Bottom Layer-No Net 3" (solid, pour order 50): 5,5
no net on Bottom Layer "Bottom Layer-No Net 2" (solid, pour order 42): 28.3,49.5
NetJ2_1 on Bottom Layer "Bottom Layer-NetJ2_1" (solid, pour order 36): 39,46.6 39.5,46.1 47.4,46.1 47.8,46.5 47.8,52.8 49.6,54.6 54.8,54.6 55.5,53.9 55.5,49.1 55.8,48.8 60.3,48.8 60.8,49.3 60.8,55.2 57.6,58.4 49.2,58.4 49.2,58.3 44.5,53.6 44.5,50.3 43.6,49.4 39.6,49.4 39,48.8
no net on Bottom Layer "Bottom Layer-No Net" (solid, pour order 16): 11,72
no net on Bottom Layer "Bottom Layer-No Net 1" (solid, pour order 12): 4.8,74.9
NetC1_1 on Top Layer "Top Layer-NetC1_1 1" (solid, pour order 46): 16.9,39.2 17.8,40.1 22.1,40.1 23.1,39.1 23.1,33.9 22.2,33 17.9,33 16.9,34
NetD1_2 on Top Layer "Top Layer-NetD1_2" (solid, pour order 44): 32.136,47.236 33.1,48.2 33.1,53.2 32.55,53.75 29.05,53.75 28.4,53.1 28.4,47.636 28.8,47.236
NetC1_1 on Top Layer "Top Layer-NetC1_1" (solid, pour order 10): 28.6,33 28.225,32.625 27.2,33.4 27.2,40.2 33.5,46.5 33.5,54 32.4,55.1 24.9,55.1 23.7,56.3 23.7,67.9 27.8,72 57.2,72 61.5,67.7 61.5,55.8 60.4,54.7 39.2,54.7 37.3,52.8 37.3,48.9 36.5,48.1 36.5,38.35 35.6,37.45 33.05,37.45
NetJ2_2 on Top Layer "Top Layer-NetJ2_2" (solid, pour order 38): 50.495,45.8 45.6,50.695 45.6,53.3 51,47.9 53.1,45.8
NetJ2_2 on Top Layer "Top Layer-NetJ2_2 1" (solid, pour order 34): 65.111,50.1
NetJ2_2 on Top Layer "Top Layer-NetJ2_2 2" (solid, pour order 32): 60.8,46.1 61.8,46.1 69,53.3 72.1,50.2 72.1,50 59.2,37.1 58.661,37.639 58.661,46
NetJ2_1 on Top Layer "Top Layer-NetJ2_1 1" (solid, pour order 30): 55.5,48.8 60.821,48.8 60.821,48.821 69.4,57.4 72.5,57.4 72.6,57.5 72.6,62.6 67.5,62.6 63.2,58.3 63.2,55.7 61.1,53.6 55.5,53.6
NetJ2_1 on Top Layer "Top Layer-NetJ2_1" (solid, pour order 6): 37.5,46 39.4,47.9 47.7,47.9 48.068,47.532 48.068,43.368 48,43.3 47.9,43.4 37.5,43.4
GND on Top Layer "Top Layer-GND" (solid, pour order 28): 9.5,38.929 9.5,34 10.6,32.9 14.8,32.9 16,34.1 16,39.1 15,40.1 10.364,40.1
no net on Top Layer "Top Layer-No Net" (solid, pour order 26): 18.8,30.5
GND on Top Layer "Top Layer-GND 1" (solid, pour order 22): 66.9,30.2 68.7,28.4 76.9,28.4 79.4,30.9 79.4,35.8 78.4,36.8 77,36.8 75,34.8 67.621,34.8 66.9,34.079
NetQ5_3 on Top Layer "Top Layer-NetQ5_3" (solid, pour order 18): 62.12,35.7 46.6,35.7 44.3,33.4 44.3,29.2 45,28.5 46.9,28.5 52.2,33.8 53.7,33.8 53.9,33.6 53.9,29.3 54.7,28.5 60.821,28.5 67.321,35 75.2,35 75.62,35.42 75.62,39.68 74.9,40.4 66.82,40.4

## Keep-outs
Keep-Out Layer:
  the board outline again, w1.2

## Silkscreen, mask and mechanical layers (free items; w line width, h text height)
Top Overlay:
  text "Motor Controller v2" at 44,24.2 h1.27